# Altium PCB ElderBot.PcbDoc
Units mm, origin at the board's own origin, x right, y up, seen from the top; angles counter-clockwise.
Board outline 54 x 50.06 mm, 2 copper layers (Top Layer, Bottom Layer), stack 1.534 mm thick; 19 components, 18 nets, 90 pads, 1 vias.
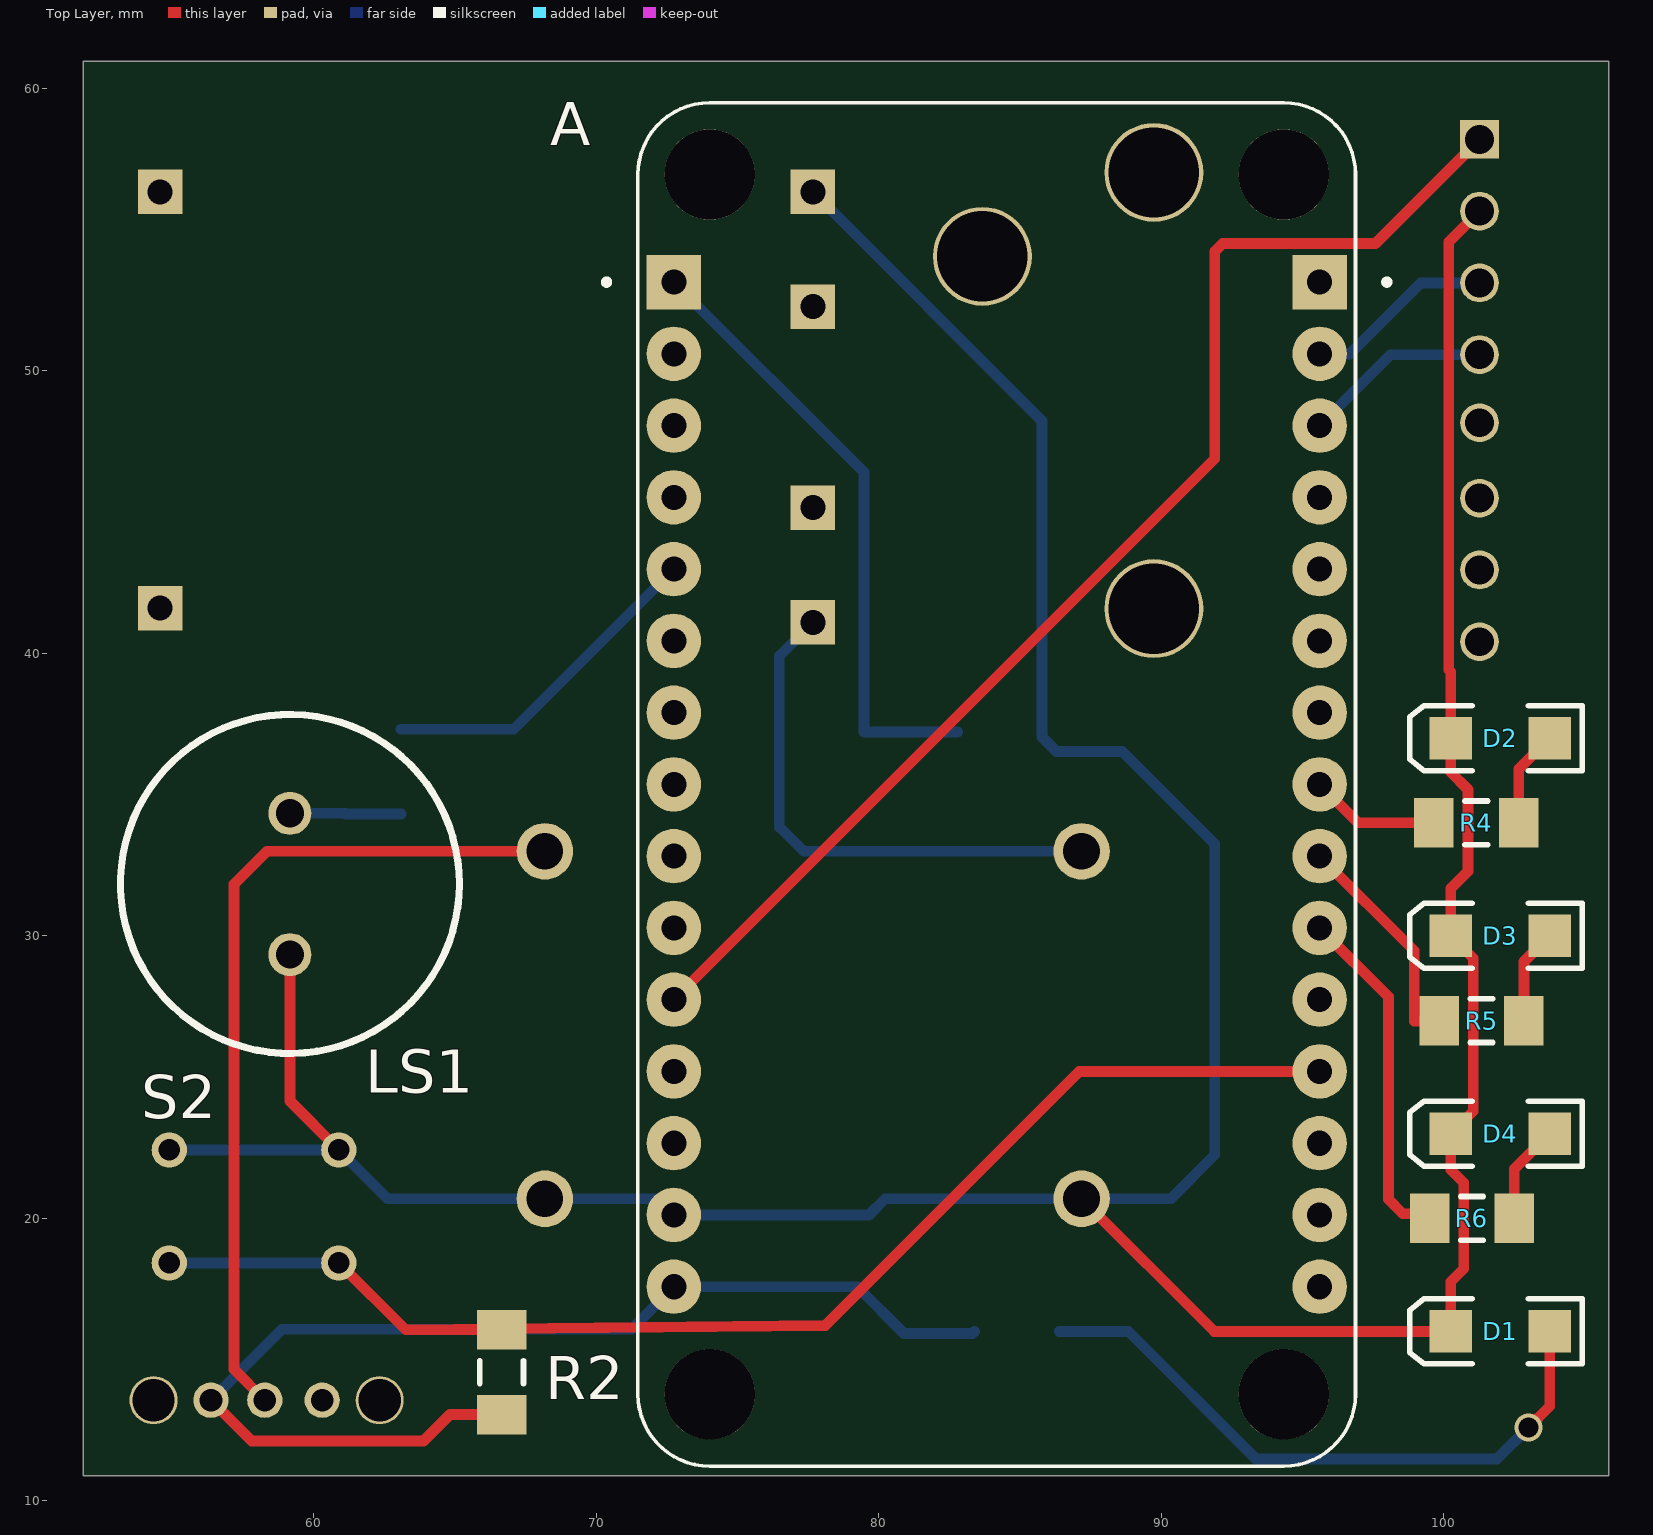
[diagram p0: Top Layer view]
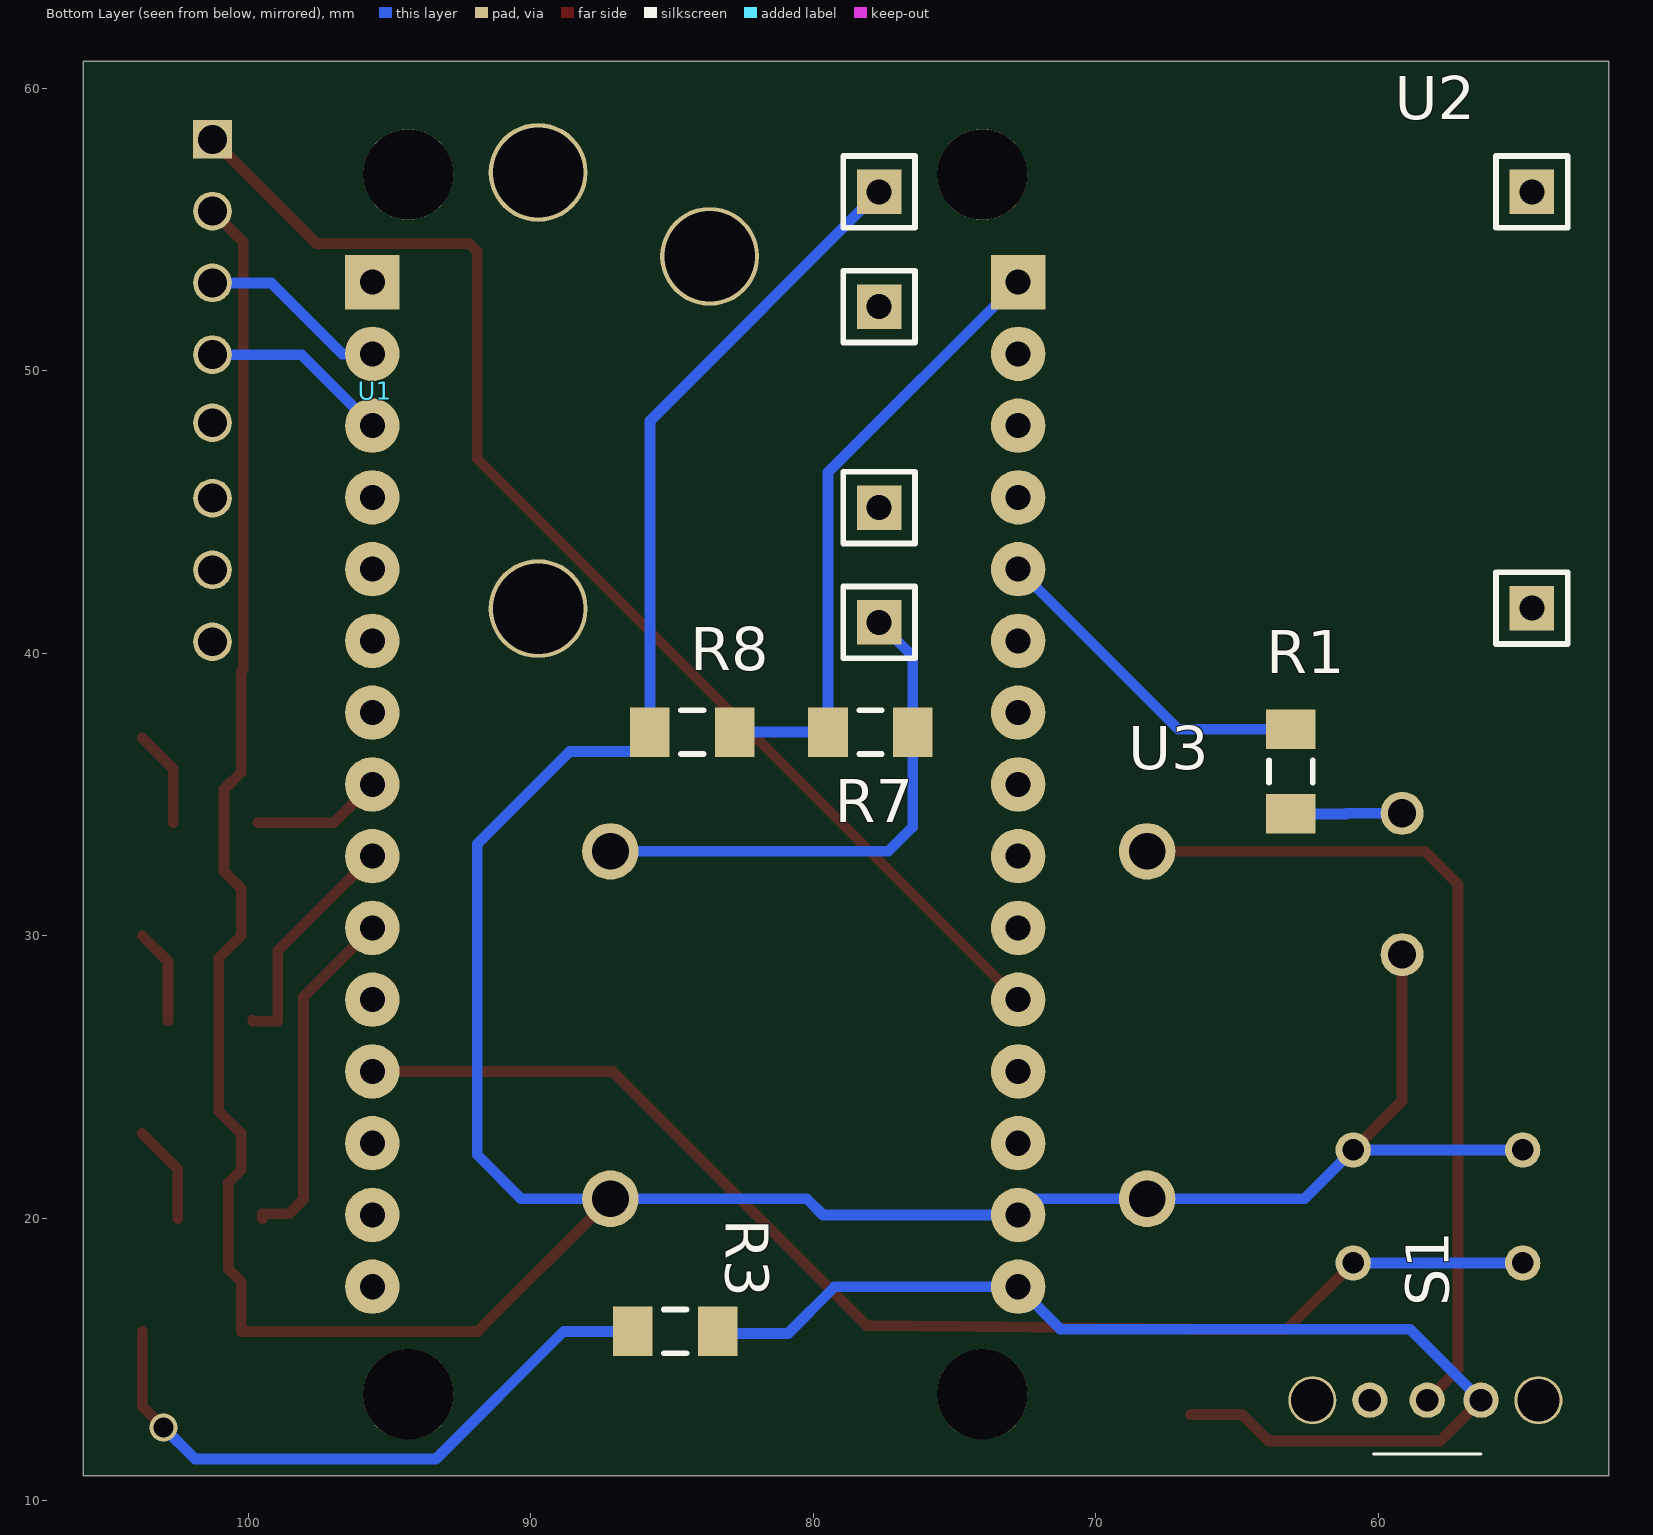
[diagram p1: Bottom Layer view, seen from below]
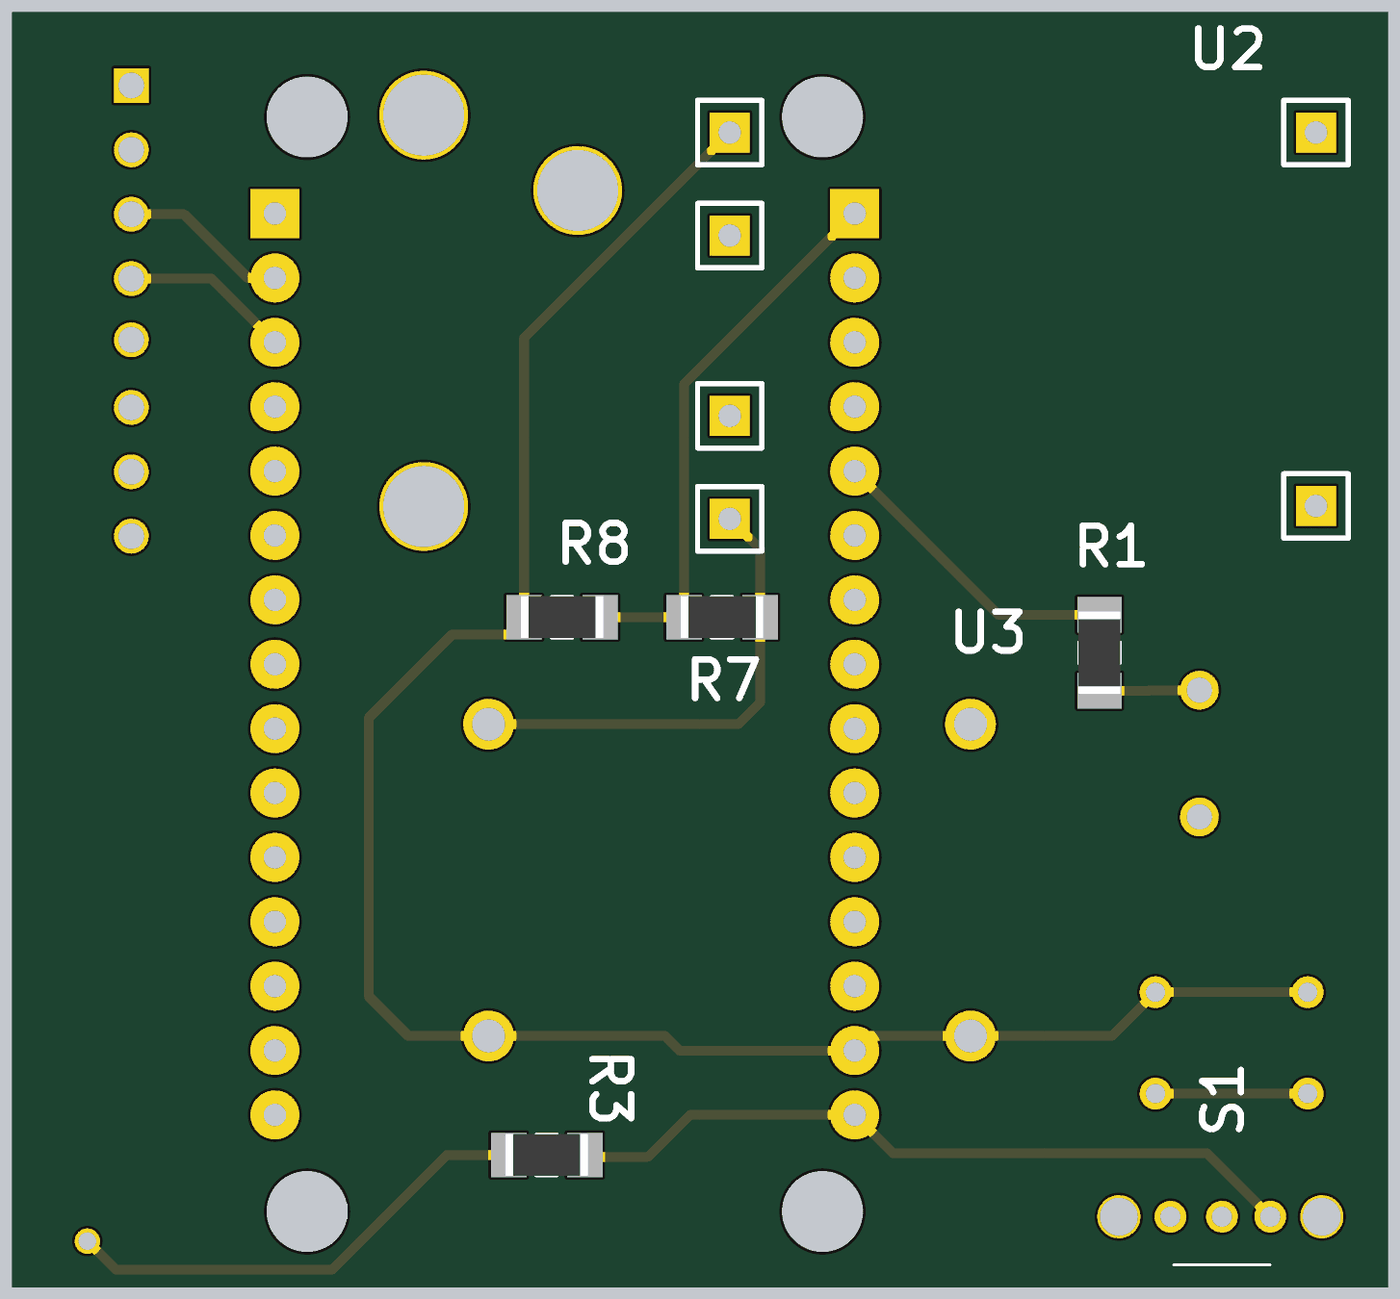
[diagram p2: 3D render of the assembled board from below, using the file's embedded part models]

## Layer stack, top to bottom
Top Solder: solder mask 0.0127, Solder Resist, Dk 3.3
Top Layer: signal copper 0.0178
Dielectric1: core 1.4986, FR-4, Dk 4.3
Bottom Layer: signal copper 0.0178
Bottom Solder: solder mask 0.0127, Solder Resist, Dk 3.3

## Board outline
51.841,10.897 105.842,10.897 105.842,60.96 51.841,60.96

## Design rules (kind name [scope] priority, off if disabled: settings)
BoardOutlineClearance [All] p1: gap=0.2 ignorepadtopadclearanceinfootprint=FALSE except(0.4: Arc-SplitBarrior Arc-SplitContinuation Track-SplitBarrior Track-SplitContinuation SMDPad-SplitBarrior SMDPad-SplitContinuation THPad-SplitBarrior THPad-SplitContinuation Via-SplitBarrior Via-SplitContinuation Fill-SplitBarrior Fill-SplitContinuation Poly-SplitBarrior Poly-SplitContinuation Region-SplitBarrior Region-SplitContinuation Text-SplitBarrior Text-SplitContinuation)
Clearance "Clearance Bottom Layer" [OnLayer('Bottom Layer')] p1: gap=0.5 ignorepadtopadclearanceinfootprint=TRUE
Clearance "Clearance Top Layer" [OnLayer('Top Layer')] p2: gap=0.203 ignorepadtopadclearanceinfootprint=TRUE except(0.254: Arc-Text Track-Text SMDPad-Text THPad-Text Via-Text Fill-Text Poly-Text Region-Text Text-Text)
Clearance [All] p3: gap=0.2 ignorepadtopadclearanceinfootprint=FALSE except(0.089: Arc-Arc Arc-Track Arc-SMDPad Track-Track Track-SMDPad SMDPad-SMDPad; 0.127: Arc-Via Track-Via SMDPad-Via THPad-Via Via-Via; 0.254: Arc-Text Track-Text SMDPad-Text THPad-Text Via-Text Fill-Text Poly-Text Region-Text Text-Text)
HoleSize [All] p1: absolutevalues=TRUE maxlimit=6.3 minlimit=0.2 maxpercent=80.000 minpercent=20.000
MinimumAnnularRing [All] p1: minimumring=0.076
MinimumSolderMaskSliver [All] p1: minsoldermaskwidth=0.1
PolygonConnect PolygonConnect_1 [All] p1: thpad.connectstyle=Relief thpad.reliefconductorwidth=0.508 thpad.reliefentries=4 thpad.polygonreliefangle="90 Angle" thpad.airgapwidth=0.254 smdpad.connectstyle=Relief smdpad.reliefconductorwidth=0.508 smdpad.reliefentries=4 smdpad.polygonreliefangle="90 Angle" smdpad.airgapwidth=0.254 via.connectstyle=Direct via.reliefconductorwidth=0.508 via.reliefentries=4 via.polygonreliefangle="90 Angle" via.airgapwidth=0.254
RoutingCorners [All] p1: cornerstyle=Round minsetback=2.54 maxsetback=2.54
RoutingVias [All] p1: holewidth=0.5 width=1 viastyle="Through Hole" minholewidth=0.2 minwidth=0.45 maxholewidth=1 maxwidth=2
SilkToSilkClearance [All] p1: silktosilkclearance=0.1
SilkToSolderMaskClearance [IsPad] p1: minsilkscreentomaskgap=0.1 clearancetoexposedcopper=TRUE
SolderMaskExpansion [All] p1: expansion=0.102 istentingtop=FALSE
Width [All] p1: maxlimit=2.54 minlimit=0.089 preferedwidth=0.381
25 further rules are at their usual default settings.

## Components (designator, comment, footprint, x,y, rotation, side; value= is the part's Value field where it differs from the comment)
A "NodeMCU" SEEED_113990105 84.177,35.361 r0 top
D1 "LED3" 3.2X1.6X1.1 102,16 r180 top
D2 "LED3" 3.2X1.6X1.1 102,37 r180 top
D3 "LED3" 3.2X1.6X1.1 102,30 r180 top
D4 "LED3" 3.2X1.6X1.1 102,23 r180 top
LS1 "Buzzer" BUZZER 59.157,31.837 r270 top
R1 "Resistor 1k +/-1% 1206 250 mW" RESC3116X70X50ML13T20 63.094,35.815 r270 bottom value=1k
R2 "Resistor 1k +/-1% 1206 250 mW" RESC3116X70X50ML13T20 66.65,14.554 r270 top value=1k
R3 "Resistor 1k +/-1% 1206 250 mW" RESC3116X70X50ML13T20 84.888,16 r0 bottom value=1k
R4 "Resistor 1k +/-1% 1206 250 mW" RESC3116X70X50ML13T20 101.154,34 r0 top value=1k
R5 "Resistor 1k +/-1% 1206 250 mW" RESC3116X70X50ML13T20 101.34,27 r0 top value=1k
R6 "Resistor 1k +/-1% 1206 250 mW" RESC3116X70X50ML13T20 101,20 r0 top value=1k
R7 "Resistor 1k +/-1% 1206 250 mW" RESC3116X70X50ML13T20 77.978,37.215 r180 bottom value=2.2M
R8 "Resistor 1k +/-1% 1206 250 mW" RESC3116X70X50ML13T20 84.284,37.215 r180 bottom value=2.2M
S1 "Switch" SWITCH 58.268,13.564 r0 bottom
S2 "PushButton" PUSHBUTTON 57.887,20.422 r0 top
U1 "MPU6050" MPU6050 101.267,58.194 r90 bottom
U2 "TP4056" TP4056 52.164,57.978 r0 bottom
U3 "SX1308" SX1308 66.182,18.694 r90 bottom

## Footprints (in the part's own frame and the unit in brackets; to place one, negate y for a bottom-side part, rotate by r counter-clockwise, add the part's x,y. Pads: shape width x height; smd on the part's side, far side on the other; paste and mask are expansions set on the pad)
3.2X1.6X1.1 [mm] "SMT LED; 2 Flat Leads"
  rect 1.5x1.5 smd: 1(-1.75,0) 2(1.75,0)
  silkscreen extent -2.9,-1.15 3.2,1.15
BUZZER [mm]
  round 1.524 hole 1: 1(-2.5,0) 2(2.5,0)
  silkscreen extent -6,-6 6,6
MPU6050 [mm]
  rect 1.37x1.37 hole 1.02: 1(0,0)
  round 1.37 hole 1.02: 2(-2.54,0) 3(-5.08,0) 4(-7.62,0) 5(-10.033,0) 6(-12.7,0) 7(-15.24,0) 8(-17.78,0)
  round 3.5 hole 3.2: 9(-1.171,-11.529) 10(-16.609,-11.529)
PUSHBUTTON [mm]
  round 1.25 hole 0.762: 1(-3,-2) 2(3,-2) 3(-3,2) 4(3,2)
RESC3116X70X50ML13T20 [mm] "Chip Resistor, 2-Leads, Body 3.25x1.65mm, IPC Low Density"
  rect 1.4x1.75 smd: 1(-1.5,0) 2(1.5,0)
  silkscreen extent -0.4,-0.77 0.4,0.78, body extent -1.63,-0.82 1.63,0.82, height 0.7
SEEED_113990105 [mm]
  rect 1.93x1.93 hole 0.889: J1_1(-11.43,17.78) J2_1(11.43,17.78)
  round 1.93 hole 0.889: J1_2(-11.43,15.24) J1_3(-11.43,12.7) J1_4(-11.43,10.16) J1_5(-11.43,7.62) J1_6(-11.43,5.08) J1_7(-11.43,2.54) J1_8(-11.43,0) J1_9(-11.43,-2.54) J1_10(-11.43,-5.08) J1_11(-11.43,-7.62) J1_12(-11.43,-10.16) J1_13(-11.43,-12.7) J1_14(-11.43,-15.24) J1_15(-11.43,-17.78) J2_2(11.43,15.24) J2_3(11.43,12.7) J2_4(11.43,10.16) J2_5(11.43,7.62) J2_6(11.43,5.08) J2_7(11.43,2.54) J2_8(11.43,0) J2_9(11.43,-2.54) J2_10(11.43,-5.08) J2_11(11.43,-7.62) J2_12(11.43,-10.16) J2_13(11.43,-12.7) J2_14(11.43,-15.24) J2_15(11.43,-17.78)
  round 3.2 hole 3.2 unplated: ""(-10.16,-21.59) ""(-10.16,21.59) ""(10.16,-21.59) ""(10.16,21.59)
  silkscreen extent -13.91,-24.13 13.91,24.13
SWITCH [mm]
  round 1.7 hole 1.5: 0(-3.937,0) 4(4.064,0)
  round 1.25 hole 0.8: 1(-1.905,0) 2(0,0) 3(2.032,0)
  silkscreen extent -1.9,1.9 1.9,1.9
SX1308 [mm]
  round 2 hole 1.3: 1(14.3,21) 2(2,21) 3(2,2) 4(14.3,2)
TP4056 [mil]
  rect 62x62 hole 35: 1(94.31,644.58) 2(94.31,64.58) 3(1004.31,504.58) 4(1004.31,224.58) 5(1004.31,664.58) 6(1004.31,64.58)
  silkscreen extent 44,15 1054,715

## Part data
A: library part 113990105, "An open-source firmware and development kit that helps you to Prototype your IOT product within a few Lua script lines", Package=None, Availability=Unavailable, MF="Seeed Technology", MP="NodeMCU v2", Price=None, SnapEDA_Link=https://www.snapeda.com/parts/NodeMCU%20v2/Seeed%20Technology%20Co.%2C%20Ltd/view-part/378076/?ref=snap
D1 D2 D3 D4: "Typical BLUE SiC LED", DatasheetVersion=16-Apr-2002, LatestRevisionDate=17-Dec-2003, LatestRevisionNote="PCB Footprint replaced.", PackageDescription="SM LED; 2 C-Bend Leads; Body 3.5 x 2.8 x 1.9 mm, inc leads (LxWxH typ)", PackageReference=3.5X2.8X1.9, PackageVersion=16-Apr-2002, Published=8-Jun-2000, Publisher="Altium Limited"
LS1: "Magnetic Transducer Buzzer", ComponentLink1Description="Manufacturer Link", ComponentLink1URL=http://www.megastar.com/linecard/buzzmode/index.php, DatasheetVersion=17-Dec-2003, LatestRevisionDate=17-Dec-2003, LatestRevisionNote="Schematic revised, PCB Footprint replaced.", PackageDescription="Magnetic Transducer Buzzer", PackageReference=ABSM-1574, Published=24-Mar-1999, Publisher="Altium Limited"
R1 R2 R3 R4 R5 R6 R7 R8: library part CMP-009-00011-5, "Chip Resistor, 1 KOhm, +/- 1%, 0.25 W, -55 to 155 degC, 1206 (3216 Metric)", Case/Package=1206, Max Operating Temperature=155°C, Min Operating Temperature=-55°C, Power=250mW, Tolerance=1%, Voltage Rating=200V, Mounting Technology=SM, Pins=2, RoHS Compliant=True

## Free pads (board coordinates)
  round 3.5 hole 3.2: ""(83.668,54.051)

## Via types
v1: diameter 1, hole 0.7, Top Layer to Bottom Layer, 1 vias

## Nets (pads, with @x,y where several pads share a name; then routed paths per layer and width w, separated by ;. In a path a pad name is that pad's centre, name@x,y a point inside that pad or via, vN(x,y) a via of type N, cw(c..) or ccw(c..) an arc to the next point about the centre after c; other vN are vias at no path point)
+3.3: A.J1_11 U1.1 | length 45.4
  Top Layer w0.381: A.J1_11 91.897,46.891 91.897,54.229 92.177,54.508 97.582,54.508 U1.1
+5: A.J1_15 R2.2 R3.1 S1.1 | length 40.7
  Top Layer w0.381: S1.1 57.81,12.116 63.882,12.116 64.821,13.054 R2.2
  Bottom Layer w0.381: S1.1 58.877,16.078 71.244,16.078 A.J1_15 79.244,17.581 80.899,15.926 83.314,15.926 R3.1
BatteryVoltage: A.J1_1 R7.1 R8.2 | length 22
  Bottom Layer w0.381: A.J1_1 79.478,46.41 R7.1 R8.2
Button: A.J2_12 R2.1 S2.1 S2.2 | length 48.8
  Top Layer w0.381: S2.2 63.254,16.054 ; R2.1 63.254,16.054 ; A.J2_12 87.101,25.201 78.105,16.205 66.649,16.089 63.254,16.054
  Bottom Layer w0.381: S2.1 S2.2
Buzzer: A.J1_5 R1.1 | length 12
  Bottom Layer w0.381: R1.1 67.081,37.315 A.J1_5
Emergency: A.J2_10 R6.1 | length 12.4
  Top Layer w0.381: A.J2_10 98.044,27.844 98.044,20.676 98.552,20.168 99.5,20.168 R6.1
GND: A.J1_14 D1.2 D2.2 D3.2 D4.2 LS1.2 R8.1 S2.3 S2.4 U1.2 U2.6 U3.2 U3.3 | length 144.5
  Top Layer w0.381: LS1.2 59.157,24.152 S2.4 ; U3.2 91.876,16 D1.2 100.25,17.755 100.711,18.216 100.711,21.26 100.25,21.721 D4.2 101.041,23.791 101.041,29.209 D3.2 100.25,31.674 100.863,32.287 100.863,35.179 100.25,35.792 D2.2 100.25,39.345 100.178,39.417 100.178,54.564 U1.2
  Bottom Layer w0.381: S2.3 S2.4 62.614,20.694 U3.3 72.173,20.694 A.J1_14 79.654,20.121 80.228,20.694 U3.2 90.342,20.694 91.897,22.25 91.897,33.255 88.622,36.531 86.293,36.531 85.784,37.04 R8.1 85.784,48.227 U2.6
NetD1_1: D1.1 R3.2 | length 22.7
  Top Layer w0.381: v1(103,12.601) 103.75,13.351 D1.1
  Bottom Layer w0.381: R3.2 88.832,16 93.352,11.48 101.879,11.48 v1(103,12.601)
NetD2_1: D2.1 R4.2 | length 3.5
  Top Layer w0.381: R4.2 102.654,35.904 D2.1
NetD3_1: D3.1 R5.2 | length 3.4
  Top Layer w0.381: R5.2 102.84,29.09 D3.1
NetD4_1: D4.1 R6.2 | length 3.5
  Top Layer w0.381: R6.2 102.5,21.75 D4.1
NetLS1_1: LS1.1 R1.2 | length 3.9
  Bottom Layer w0.381: LS1.1@59.157,34.337 61.112,34.337 61.134,34.315 R1.2
NetS1_2: S1.2 U3.4 | length 30.2
  Top Layer w0.381: S1.2 57.175,14.656 57.175,31.826 58.344,32.994 U3.4
SCL: A.J2_2 U1.3 | length 6.7
  Bottom Layer w0.381: A.J2_2 96.676,50.601 99.19,53.114 U1.3
SDA: A.J2_3 U1.4 | length 6.7
  Bottom Layer w0.381: A.J2_3 98.12,50.574 U1.4
Status: A.J2_8 R4.1 | length 4.6
  Top Layer w0.381: A.J2_8 96.968,34 R4.1
Vbat: R7.2 U2.5 U3.1 | length 18.8
  Bottom Layer w0.381: U2.5 76.478,39.902 R7.2 76.478,33.858 77.342,32.994 U3.1
WiFi: A.J2_9 R5.1 | length 8.1
  Top Layer w0.381: A.J2_9 98.958,29.469 98.958,26.975 99.84,26.975 R5.1
pads on no net: A. A.J1_2 A.J1_3 A.J1_4 A.J1_6 A.J1_7 A.J1_8 A.J1_9 A.J1_10 A.J1_12 A.J1_13 A.J2_1 A.J2_4 A.J2_5 A.J2_6 A.J2_7 A.J2_11 A.J2_13 A.J2_14 A.J2_15 S1.0 S1.3 S1.4 U1.5 U1.6 U1.7 U1.8 U1.9 U1.10 U2.1 U2.2 U2.3 U2.4

## Silkscreen, mask and mechanical layers (free items; w line width, h text height)
Board:
  the board outline again, w0.254

## Dimensions
72.747,20.121 to 72.747,17.581 on Dimensions